# EAGLE board ATTiny Fuse Reset with 12V Charge Pump (EAGLE 7.2.0)
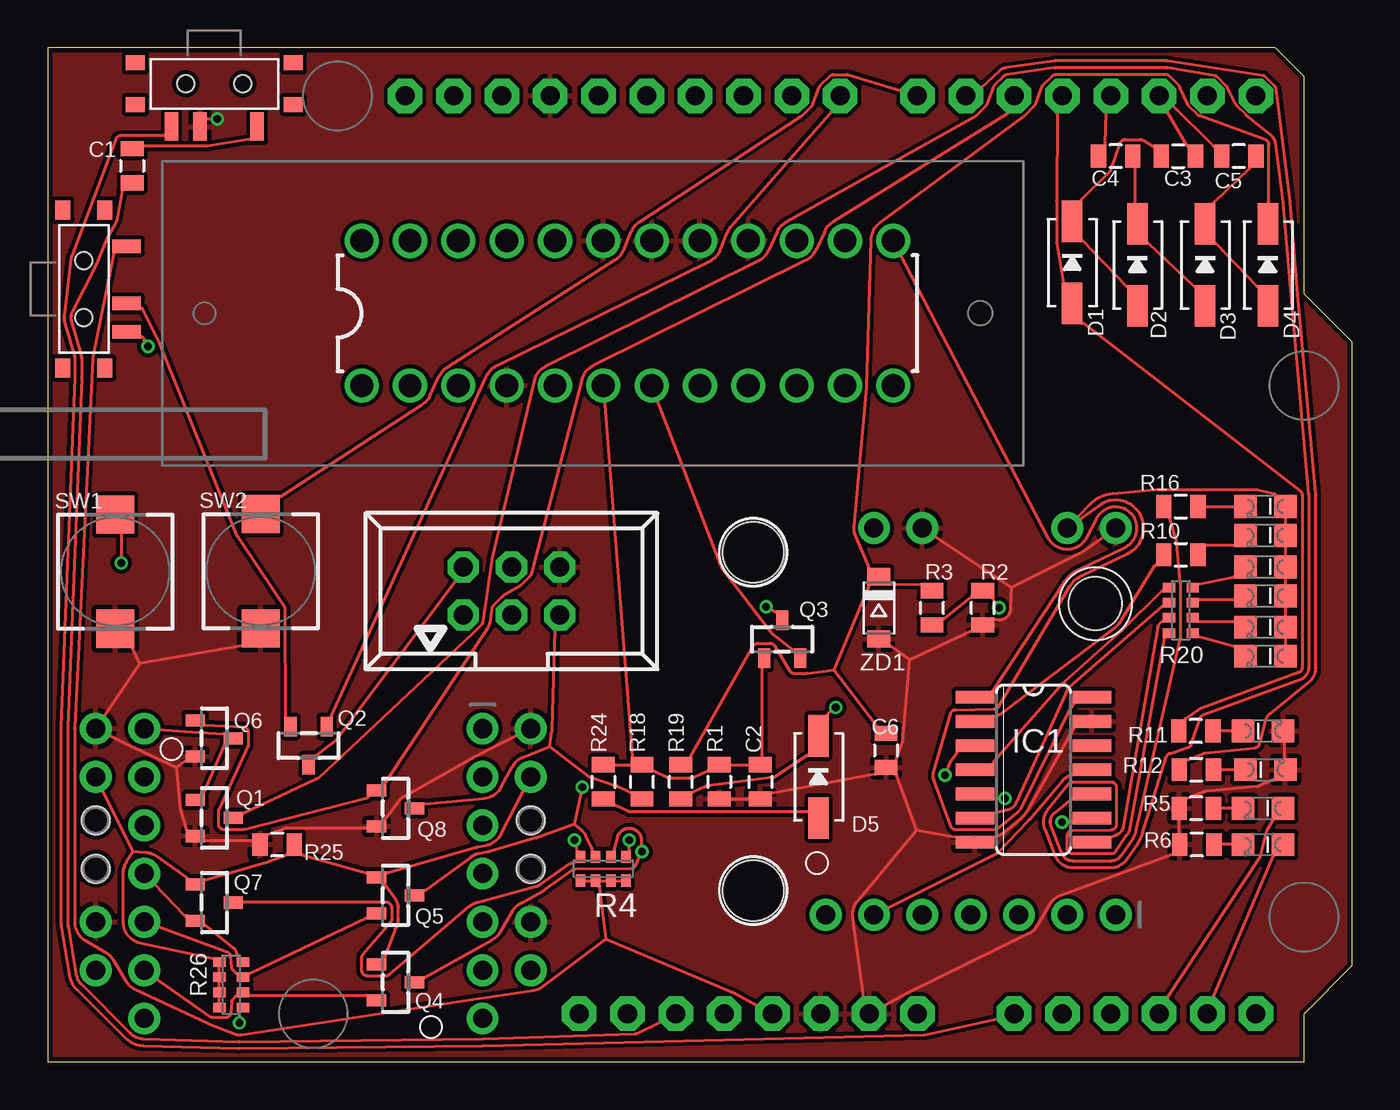
[diagram p0: board, top side]
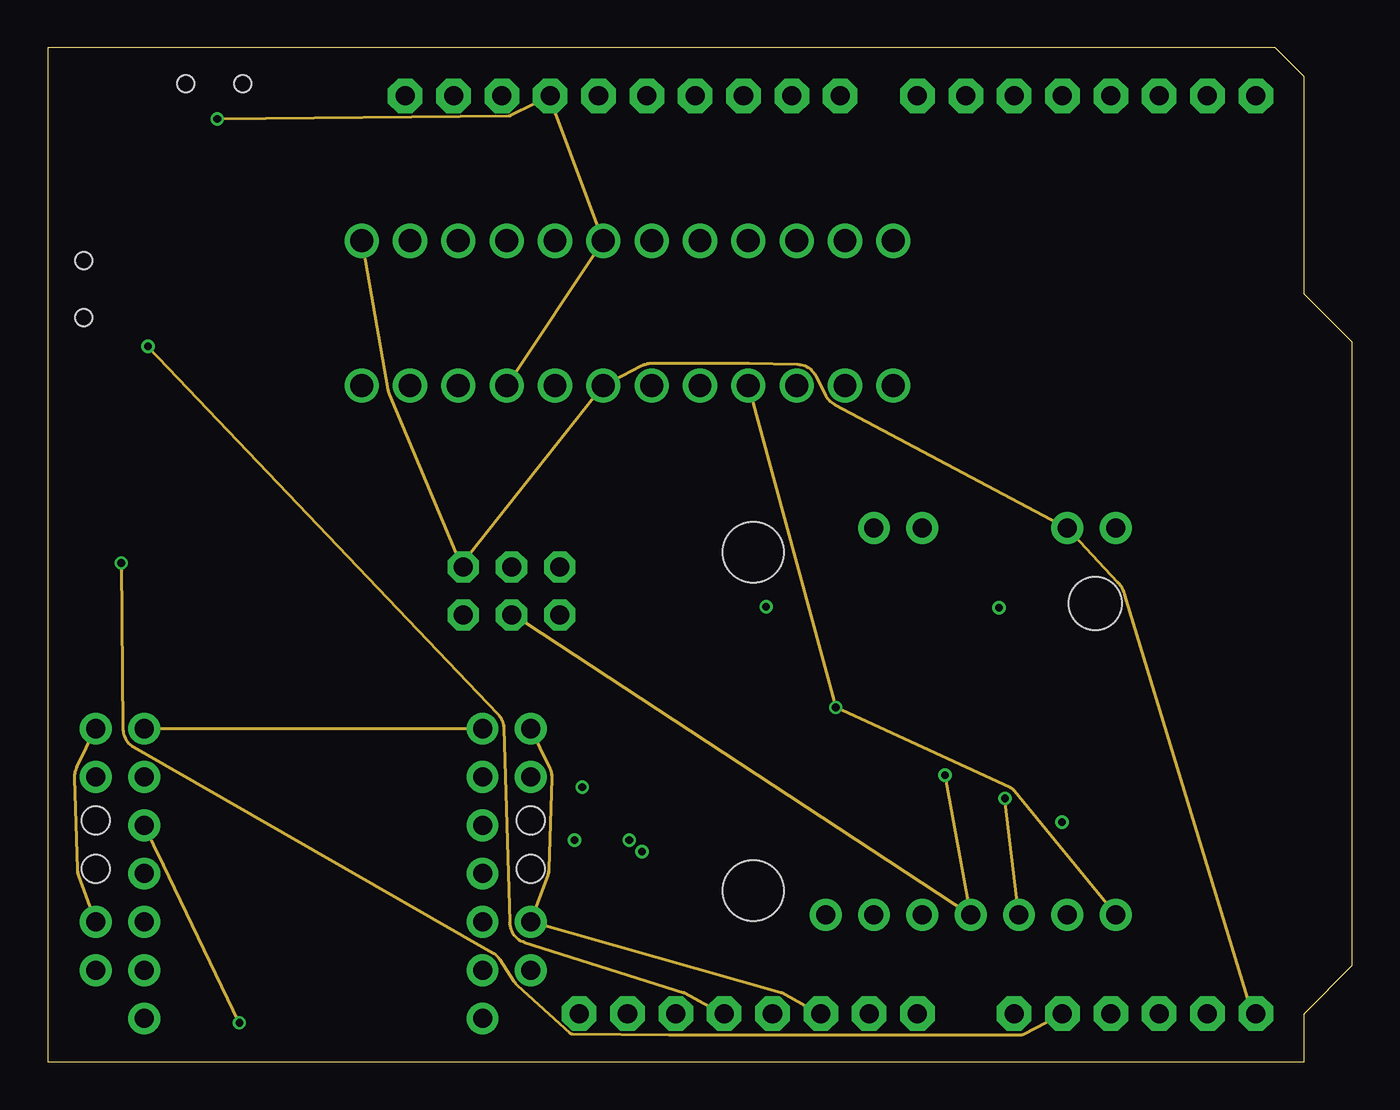
[diagram p1: board, inner layer TOP-1]
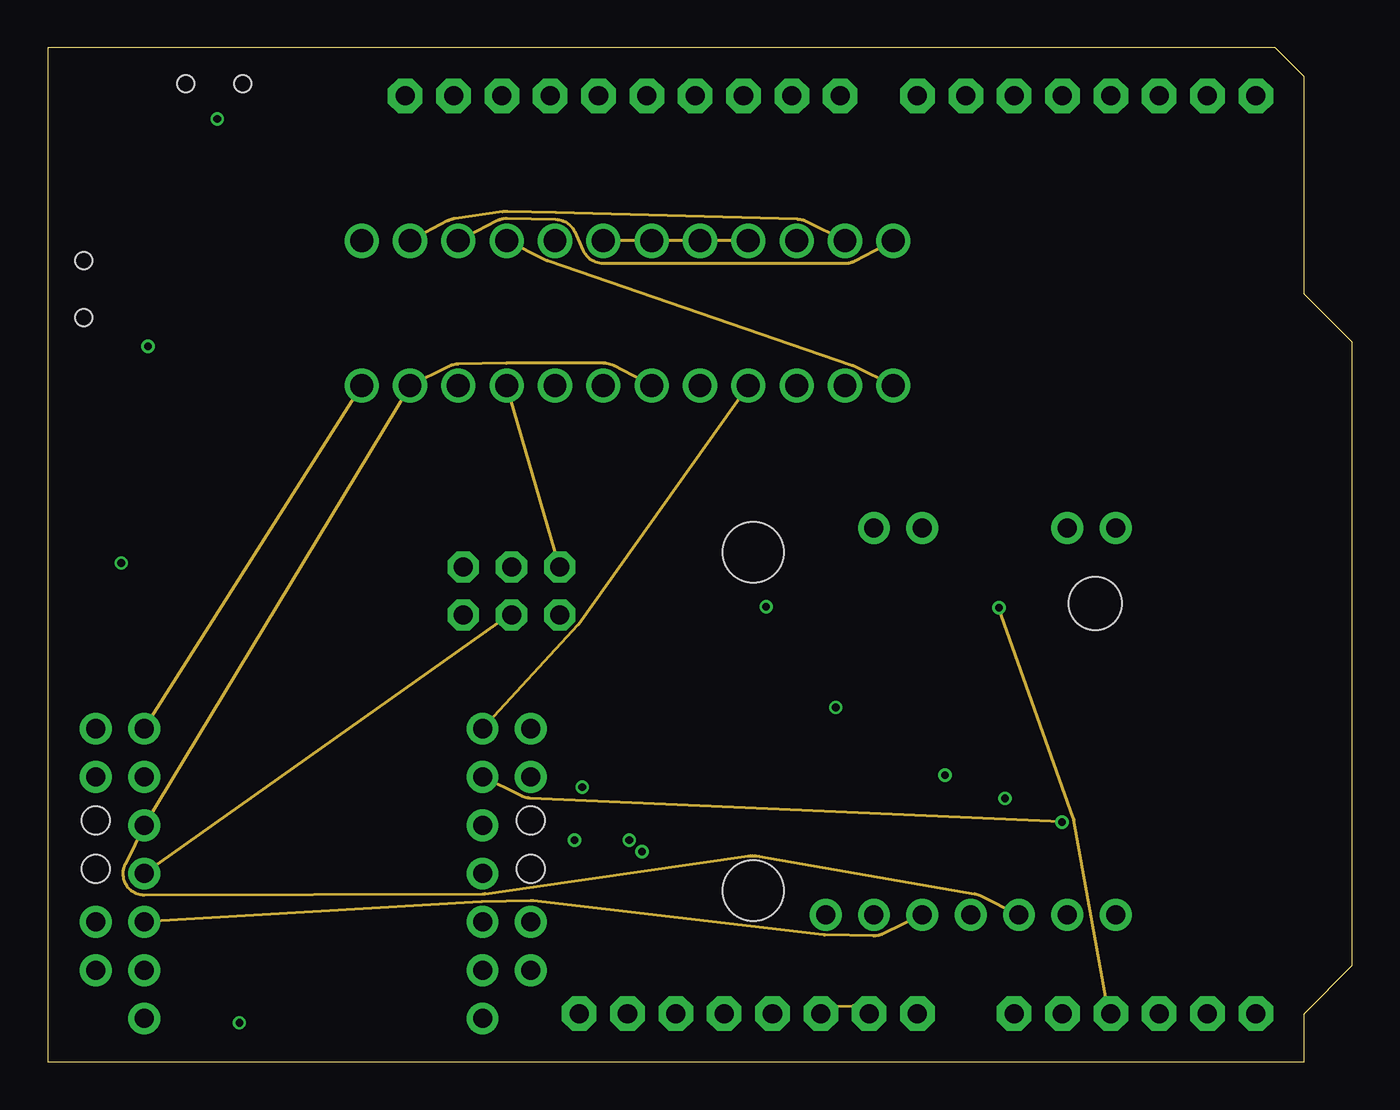
[diagram p2: board, inner layer BOTTOM+1]
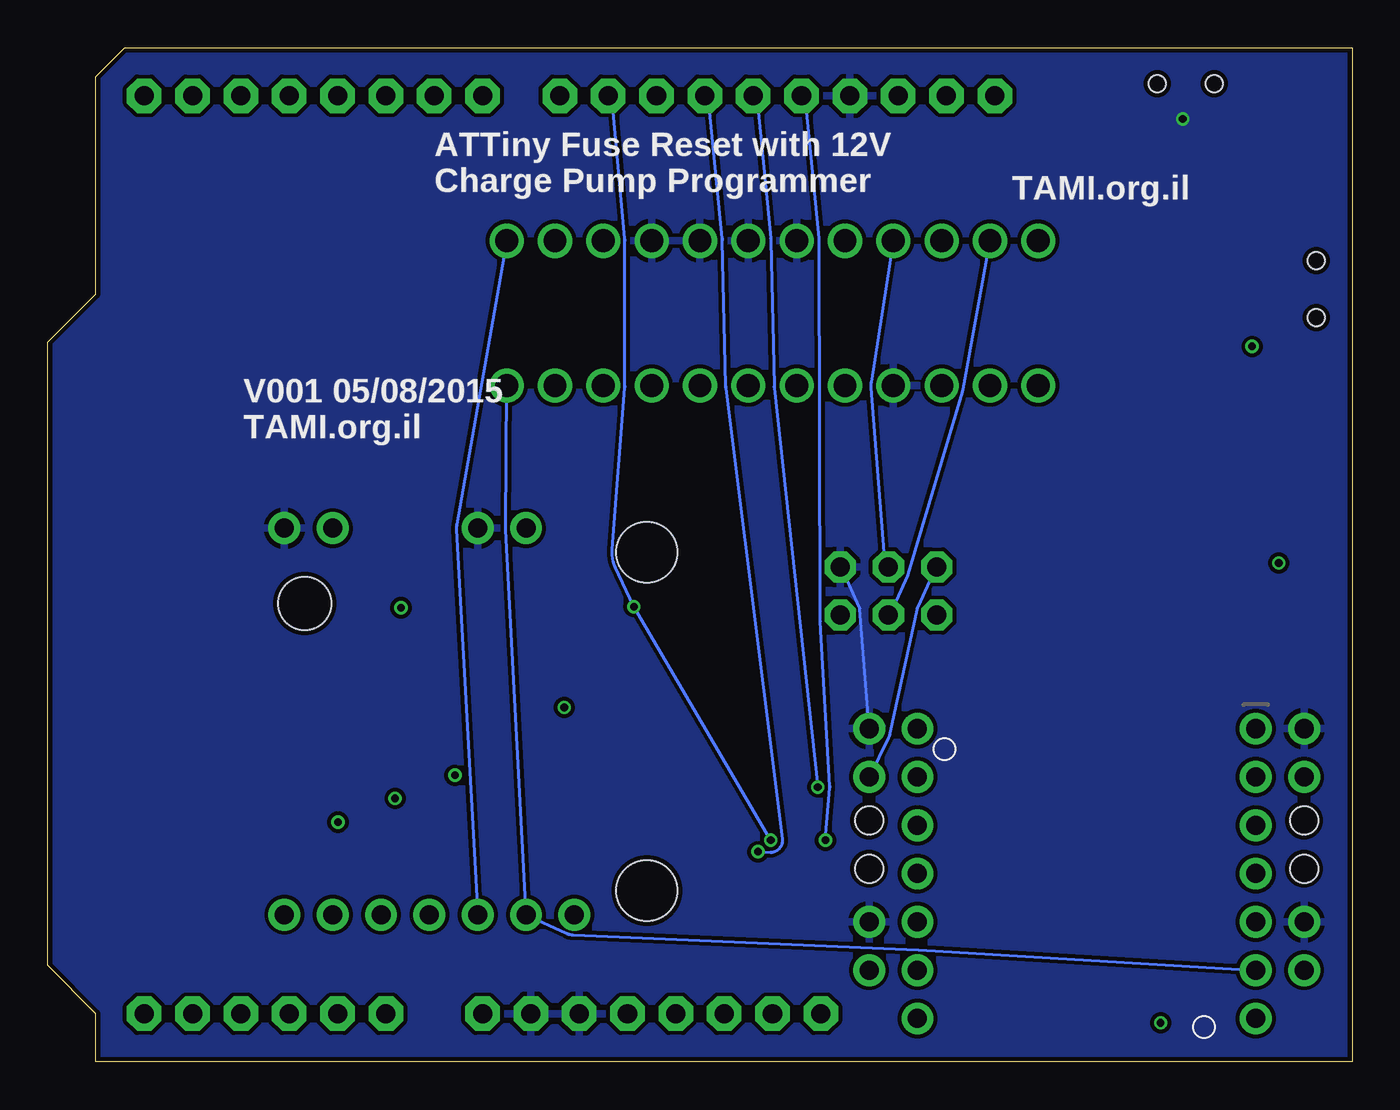
[diagram p3: board, bottom side, seen from below]

Size 68.58 x 53.34 mm. Coordinates in mm from the lower left corner, seen from the top.
Outline: 0,53.34 0,0 66.04,0 66.04,2.54 68.58,5.08 68.58,37.85 66.04,40.39 66.04,51.82 64.52,53.34 0,53.34
Copper layers 1+2+3+16: TOP 0.035mm / dielectric 0.15mm / TOP-1 0.0035mm / dielectric 0.2mm / BOTTOM+1 0.0035mm / dielectric 0.15mm / BOTTOM 0.035mm
Design rules "default": minimum track width 6mil, minimum drill 0.6mm, track to track 6mil, track to pad 8mil, pad to pad 8mil, via to via 8mil, smd to smd 8mil, copper to edge 10mil, drill to drill 8mil, minimum pad ring 0.1mm, minimum via ring 0.1mm, stop-mask expansion 4mil, vias tented up to drill 0mil, thermal gap 10mil
Net classes: 0 default: width 0.152 mm, clearance 0.205 mm

## Footprints (pad centres in the part's own frame; a part is rotated, then mirrored left to right if it is on the bottom)
BREAKOUT_TAMI_NOHOLES = drill 1 pad 1.676: 1.PB5 -10.16,-8.89; 2.PB4 -10.16,-6.35; 3.PB3 -10.16,-3.81; 4.PB2 -10.16,-1.27; 5.PB1 -10.16,1.27; 6.PB0 -10.16,3.81; 7.GND -10.16,6.35; 8.GND 10.16,-8.89; 9.VCC 10.16,-6.35; 10.GND 10.16,1.27; 11.BAT 10.16,3.81
BREAKOUT_ATTAMI = drill 1 pad 1.676: 1.PB5 1.27,1.27; 2.PB4 1.27,3.81; 3.PB3 1.27,6.35; 4.PB2 1.27,8.89; 5.PB1 1.27,11.43; 6.PB0 1.27,13.97; 7.GND 1.27,16.51; 8.GND 21.59,1.27; 9.VCC 21.59,3.81; 10.GND 21.59,11.43; 11.BAT 21.59,13.97 | hole 2.8: 17.628,2.337 | hole 3.2: 20.32,20.32; 2.54,20.32
0805 = smd 0.8 x 1.2: 1 -0.9,0; 2 0.9,0
SOD-323 = smd 2.184 x 1.067: AQ 2.159,0; CQ -2.159,0
LED-805 = smd 1.2 x 1.2: A 0,-1.05; C 0,1.05
SO14 = smd 0.66 x 2.032: 1 -3.81,-3.073; 2 -2.54,-3.073; 3 -1.27,-3.073; 4 0,-3.073; 5 1.27,-3.073; 6 2.54,-3.073; 7 3.81,-3.073; 8 3.81,3.073; 9 2.54,3.073; 10 1.27,3.073; 11 0,3.073; 12 -1.27,3.073; 13 -2.54,3.073; 14 -3.81,3.073
1X02_PP_HOLES_ONLY = drill 0.889 pad 1.397: 1 0,0; 2 2.54,0 | hole 1.473: 2.54,0; 0,0
SOT23-R = smd 0.635 x 1.016: 1 -0.95,-1; 2 0.95,-1; 3 0,1
0603-ARV = smd 0.5 x 0.65: 1 -1.2,-0.625; 2 -0.4,-0.625; 3 0.4,-0.625; 4 1.2,-0.625; 5 1.2,0.625; 6 0.4,0.625; 7 -0.4,0.625; 8 -1.2,0.625
PUSHBUTTON_SMD_SJ = smd 2 x 2: P$1 3,0; P$2 -3,0
KPS-1290 = smd 0.7 x 1.5: O -2.25,2.25; P 0.75,2.25; S 2.25,2.25 | smd 1 x 0.8: P$1 -4.15,1.1; P$2 -4.15,-1.1; P$3 4.15,-1.1; P$4 4.15,1.1 | hole 0.9: 1.5,0; -1.5,0
ARDUINOR3-BPLACE = drill 1 pad 1.815 octagon: 3V 35.56,2.54; 5V 38.1,2.54; A0 50.8,2.54; A1 53.34,2.54; A2 55.88,2.54; A3 58.42,2.54; A4 60.96,2.54; A5 63.5,2.54; AREF 23.876,50.8; D0 63.5,50.8; D1 60.96,50.8; D2 58.42,50.8; D3 55.88,50.8; D4 53.34,50.8; D5 50.8,50.8; D6 48.26,50.8; D7 45.72,50.8; D8 41.656,50.8; D9 39.116,50.8; D10 36.576,50.8; D11 34.036,50.8; D12 31.496,50.8; D13 28.956,50.8; GND 26.416,50.8; GND1 43.18,2.54; GND2 40.64,2.54; IOREF 30.48,2.54; RESERVED 27.94,2.54; RESET 33.02,2.54; SCL 18.796,50.8; SDA 21.336,50.8; VIN 45.72,2.54
DIL-24-ZIF = drill 1.2 pad 1.8: P$1 -13.97,-3.81; P$2 -11.43,-3.81; P$3 -8.89,-3.81; P$4 -6.35,-3.81; P$5 -3.81,-3.81; P$6 -1.27,-3.81; P$7 1.27,-3.81; P$8 3.81,-3.81; P$9 6.35,-3.81; P$10 8.89,-3.81; P$11 11.43,-3.81; P$12 13.97,-3.81; P$13 13.97,3.81; P$14 11.43,3.81; P$15 8.89,3.81; P$16 6.35,3.81; P$17 3.81,3.81; P$18 1.27,3.81; P$19 -1.27,3.81; P$20 -3.81,3.81; P$21 -6.35,3.81; P$22 -8.89,3.81; P$23 -11.43,3.81; P$24 -13.97,3.81
057-006-1 = drill 1 pad 1.632 octagon: 1 -2.54,-1.27; 2 -2.54,1.27; 3 0,-1.27; 4 0,1.27; 5 2.54,-1.27; 6 2.54,1.27
SOD-123 = smd 0.91 x 1.22: A 1.635,0; C -1.635,0

## Placement (x,y rotation side)
A1  [BREAKOUT_TAMI_NOHOLES]  12.7,8.64 180 top
A2  [BREAKOUT_ATTAMI]  57.4,6.48 90 top
A3  [BREAKOUT_TAMI_NOHOLES]  15.24,8.64 180 bottom
C1  [0805]  4.45,47.12 270 top
C2  [0805]  37.47,14.73 270 top
C3  [0805]  59.44,47.62 0 top
C4  [0805]  56.13,47.62 180 top
C5  [0805]  62.61,47.62 180 top
C6  [0805]  44.07,16.38 270 top
D1  [SOD-323]  53.85,42.04 270 top
D2  [SOD-323]  57.28,41.91 270 top
D3  [SOD-323]  60.83,41.91 270 top
D4  1N4148  [SOD-323]  64.14,41.91 270 top
D5  [SOD-323]  40.51,14.99 270 top
HBEAT  H.B.  [LED-805]  64.01,15.37 270 top
HVON  HV  [LED-805]  63.88,17.4 270 top
IC1  74HC04D  [SO14]  51.82,15.37 270 top
ISP  pmd  [LED-805]  63.88,13.34 90 top
ISP_ERR  err  [LED-805]  63.88,11.43 90 top
JP1  [1X02_PP_HOLES_ONLY]  25.4,10.16 90 top
JP2  [1X02_PP_HOLES_ONLY]  2.54,10.16 90 top
PB0  PB0  [LED-805]  64.01,29.21 90 top
PB1  PB1  [LED-805]  64.01,27.69 90 top
PB2  PB2  [LED-805]  64.01,26.04 90 top
PB3  PB3  [LED-805]  64.01,24.51 90 top
PB4  PB4  [LED-805]  64.01,22.86 90 top
PB5  PB5  [LED-805]  64.01,21.34 90 top
Q1  BSS138  [SOT23-R]  8.76,12.83 270 top
Q2  PMV65XP  [SOT23-R]  13.72,16.64 180 top
Q3  BSS138  [SOT23-R]  38.61,22.23 0 top
Q4  BSS138  [SOT23-R]  18.29,4.19 270 top
Q5  BSS138  [SOT23-R]  18.29,8.76 270 top
Q6  BSS138  [SOT23-R]  8.76,17.02 270 top
Q7  BSS138  [SOT23-R]  8.76,8.38 270 top
Q8  BSS130  [SOT23-R]  18.29,13.34 270 top
R1  4.7K  [0805]  35.31,14.73 270 top
R2  [0805]  49.15,23.88 90 top
R3  [0805]  46.48,23.88 90 top
R4  4k7  [0603-ARV]  29.21,10.16 180 top
R5  [0805]  60.38,13.34 180 top
R6  [0805]  60.4,11.43 180 top
R10  330R  [0805]  59.56,26.67 0 top
R11  [0805]  60.35,17.4 180 top
R12  [0805]  60.38,15.37 0 top
R16  330R  [0805]  59.56,29.21 0 top
R18  4.7K  [0805]  31.24,14.73 90 top
R19  [0805]  33.27,14.73 90 top
R20  330R  [0603-ARV]  59.56,23.75 90 top
R24  [0805]  29.21,14.73 270 top
R25  1k  [0805]  12.06,11.43 180 top
R26  4k7  [0603-ARV]  9.65,4.06 90 top
SW1  [PUSHBUTTON_SMD_SJ]  3.56,25.78 270 top
SW2  [PUSHBUTTON_SMD_SJ]  11.2,25.81 270 top
SW3  SWITCH_SPDT  [KPS-1290]  8.76,51.44 180 top
SW4  SWITCH_SPDT  [KPS-1290]  1.91,40.64 270 top
U1  [ARDUINOR3-BPLACE]  0,0 0 top
U$2  ZIFSOCKET-24  [DIL-24-ZIF]  30.48,39.37 0 top
X1  [057-006-1]  24.38,24.77 0 top
ZD1  [SOD-123]  43.69,23.88 270 top

## Library data of the parts
A1-A3 C1-C6 D1-D5 HBEAT HVON ISP ISP_ERR PB0 PB1-PB5 R1-R3 R5 R6 R10-R12 R16 R18 R19 R24 R25 U1 = ATtami
IC1 = 74xx-eu
JP1 JP2 = SparkFun-Connectors
Q1-Q8 SW1 SW2 = microbuilder
R4 R20 R26 = SparkFun-Passives
SW3 SW4 = SparkFun-Electromechanical
U$2 = ATTiny Fuse Reset with 12V Charge Pump
X1 = con-panduit
ZD1 = dp_devices

## Nets
11.5V: C6.1 D4.CQ R3.2 R19.2 ZD1.C
ATTINY_VCC: A1.9.VCC A2.9.VCC A3.9.VCC C2.1 IC1.14 PB0.A PB1.A PB2.A PB3.A PB4.A PB5.A Q2.3 Q3.1 Q4.1 Q5.1 Q7.1 R1.1 R18.2 R24.1 R25.1 R26.5 R26.6 R26.7 R26.8 U1.A5 U$2.P$6 U$2.P$24 X1.2
GND: A1.8.GND A1.10.GND A2.8.GND A2.10.GND A3.8.GND A3.10.GND C2.2 C6.2 HBEAT.C HVON.C IC1.7 IC1.13 Q1.2 Q6.2 Q8.2 R1.2 R2.1 R5.2 R6.2 R25.2 SW1.P$1 SW2.P$1 SW3.P U1.GND U1.GND1 U1.GND2 U$2.P$4 U$2.P$16 U$2.P$17 U$2.P$18 U$2.P$19 X1.6 ZD1.A
HV/RESET: A1.1.PB5 A2.1.PB5 A3.1.PB5 D5.CQ Q1.1 Q6.3 R19.1 U$2.P$1 U$2.P$9
HV_OFF(RESET): Q6.1 Q8.1 U1.D5
HV_SENSE: R2.2 R3.1 U1.A2
ISP_RESET: Q8.3 R18.1 X1.5
N$1: Q2.2 SW4.P
N$2: Q3.3 R4.1 U1.D9
N$3: SW3.S U1.A0
N$4: HVON.A R11.1
N$5: D5.AQ R24.2
N$6: ISP.C R5.1
N$7: A1.2.PB4 IC1.9
N$8: Q4.3 R4.2 U1.D11
N$9: SW1.P$2 U1.A1
N$10: C3.1 D1.CQ D2.AQ
N$11: C4.1 D2.CQ D3.AQ
N$12: C5.1 D3.CQ D4.AQ
N$13: IC1.10 R16.1
N$14: C1.1 SW3.O
N$15: ISP_ERR.C R6.1
N$16: SW4.S U1.3V
N$17: ISP_ERR.A U1.A4
N$18: ISP.A U1.A3
N$19: R12.1 U1.D6
N$20: HBEAT.A R12.2
N$21: IC1.2 R10.1
N$22: SW2.P$2 U1.D7
N$23: PB2.C R20.4
N$24: IC1.4 R20.5
N$25: PB1.C R10.2
N$26: IC1.6 R20.6
N$27: PB0.C R16.2
N$28: IC1.8 R20.7
N$29: PB3.C R20.3
N$30: PB4.C R20.2
N$31: PB5.C R20.1
N$32: Q1.3 R20.8
N$33: C1.2 U1.RESET
N$34: Q7.3 R4.4 U1.D13
N$36: X1.1
N$37: Q5.3 R4.3 U1.D12
P1: C3.2 C5.2 U1.D2
P2: C4.2 U1.D3
PUMP_VCC: D1.AQ R11.2 U1.D4
SCI: A2.3.PB3 A3.3.PB3 IC1.5 Q3.2 R26.1 U$2.P$2 U$2.P$7
SDI_MOSI: A2.6.PB0 A3.6.PB0 IC1.11 Q4.2 R26.2 U$2.P$12 U$2.P$21 X1.4
SDO-SCK: A2.4.PB2 A3.4.PB2 IC1.3 Q7.2 R26.4 U$2.P$14 U$2.P$23 X1.3
SII-MISO: A2.5.PB1 A3.5.PB1 IC1.1 Q5.2 R26.3 U$2.P$13 U$2.P$22
VCC: R4.5 R4.6 R4.7 R4.8 SW4.O U1.5V
VCC_OFF: Q2.1 U1.D8
VIN: U1.VIN

## Tracks (layer width: path | path; a pad name or v marks a point on that pad's centre or on a via)
11.5V
  TOP 0.152: ZD1.C 44.22,25.13 44.3,25.13 45.88,25.1 45.96,25.1 R3.2 | ZD1.C 43.15,25.13 43.15,25.06 arc-23 43.15,25.03 41.32,20.62 | D4.CQ 64.19,45.09 64.19,45.16 64.19,48.23 arc70 64.01,48.49 60.53,49.75 arc-25 60.45,49.8 59.96,50.29 arc-21 59.91,50.36 59.52,51.26 arc21 59.46,51.35 58.97,51.84 arc45 58.77,51.92 52.99,51.92 arc45 52.79,51.84 52.3,51.35 arc24 52.24,51.25 51.9,50.35 arc-24 51.84,50.25 51.35,49.76 arc-8 51.31,49.73 43.75,44.13 arc52 43.27,43.22 43.04,35.53 arc-3 43.03,35.46 42.37,28.16 arc28 42.45,27.65 43.15,26 arc-23 43.15,25.97 43.15,25.89 ZD1.C | C6.1 43.55,17.61 43.55,17.68 arc37 43.53,17.73 41.32,20.62 | R19.2 33.8,15.96 33.8,16.03 arc-30 33.81,16.07 37.09,21.87 arc-60 37.34,22.02 37.98,22.02 arc-59 38.22,21.88 39,20.57 arc59 39.24,20.43 39.88,20.43 arc7 39.91,20.44 41.32,20.62
ATTINY_VCC
  TOP 0.152: PB5.A 65.06,21.86 65.06,21.94 65.06,22.26 65.06,22.34 PB4.A 65.06,23.38 65.06,23.46 65.06,23.91 65.06,23.99 PB3.A 65.06,25.04 65.06,25.11 65.06,25.43 65.06,25.51 PB2.A 65.06,26.56 65.06,26.64 65.06,27.09 65.06,27.16 PB1.A 65.06,28.21 65.06,28.29 65.06,28.61 65.06,28.69 PB0.A 64.53,29.73 64.53,29.81 arc77 64.47,29.88 63.62,30.08 arc13 63.56,30.09 58.26,30.09 arc5 58.24,30.09 55.98,29.9 arc41 54.81,29.34 A2.9.VCC 55.27,29.27 arc-190 56.77,26.74 54.36,25.57 arc34 53.66,24.93 50,18.7 arc-58 49.77,18.57 47.72,18.52 arc72 47.46,18.32 46.57,15.25 arc36 46.58,14.86 47.46,12.4 arc70 47.73,12.21 49.76,12.21 arc39 49.94,12.28 50.94,13.1 arc25 51.2,13.43 53.62,18.36 arc-10 53.65,18.4 53.94,18.8 arc36 53.95,18.85 53.95,18.92 IC1.14 | Q5.1 16.86,9.95 16.78,9.95 arc-16 16.76,9.96 13.39,10.9 arc16 13.37,10.91 13.29,10.91 R25.1 12.64,10.91 12.56,10.91 arc21 12.54,10.9 11.67,10.57 arc-5 11.64,10.56 8.29,9.58 arc-16 8.27,9.57 8.2,9.57 Q7.1 7.33,9.57 7.33,9.65 arc55 7.3,9.71 5.72,10.82 arc32 5.15,11.02 4.5,11.06 | X1.2 21.53,25.39 21.48,25.34 arc8 21.47,25.33 15.21,16.96 arc-16 15.15,16.91 14.08,16.08 arc-37 14.03,16.07 13.96,16.07 Q2.3 | 4.5,11.06 A1.9.VCC | R26.8 9.03,3.04 9.03,3.11 9.03,3.41 9.03,3.49 R26.7 9.03,3.84 9.03,3.91 9.03,4.21 9.03,4.29 R26.6 9.03,4.64 9.03,4.71 9.03,5.01 9.03,5.09 R26.5 8.78,5.44 8.7,5.44 arc-12 8.69,5.44 4.84,6.27 arc-78 3.96,7.37 3.96,9.91 arc-33 4.15,10.52 4.5,11.06 | U$2.P$6 30.72,16.04 30.72,16.03 30.72,15.96 R18.2 | R24.1 29.73,15.63 29.81,15.63 30.64,15.63 30.72,15.63 R18.2 | R18.2 31.77,15.31 31.84,15.31 arc-25 31.88,15.3 32.55,14.98 arc25 32.67,14.95 33.87,14.95 arc25 33.99,14.98 34.67,15.3 arc-25 34.71,15.31 34.78,15.31 R1.1 35.83,15.63 35.91,15.63 36.87,15.63 36.94,15.63 C2.1 37.56,15.96 37.56,16.03 37.56,20.72 37.56,20.79 Q3.1
  TOP 0.152: Q4.1 17.72,5.38 17.72,5.46 arc-21 17.73,5.49 18.39,7.27 arc21 18.44,7.5 18.44,8.13 arc34 18.32,8.49 17.73,9.35 arc-34 17.72,9.4 17.72,9.47 Q5.1 | Q5.1 17.72,9.95 17.8,9.95 arc16 17.82,9.96 22.47,11.28 arc-5 22.59,11.3 23.07,11.4 arc51 23.8,11.95 A3.9.VCC
  TOP-1 0.152: U$2.P$24 17.89,35.35 arc13 17.96,35.1 21.46,26.76 arc22 21.48,26.73 21.53,26.68 X1.2 22.16,26.68 22.21,26.73 22.22,26.74 U$2.P$6 31.2,36.61 arc-28 31.75,36.74 36.83,36.74 arc-1 36.85,36.74 39.39,36.69 arc-62 40.37,36.08 40.91,35.04 arc35 41.38,34.56 A2.9.VCC 56.26,25.22 arc-26 56.63,24.58 63.08,3.36 arc27 63.1,3.33 63.1,3.32 63.15,3.27 U1.A5
  BOTTOM 0.152: X1.2 22.16,25.39 22.21,25.34 22.21,25.33 arc-19 22.23,25.31 22.86,23.92 arc-12 22.87,23.87 24.31,17.29 arc14 24.39,17.03 A3.9.VCC
GND  (via drill 0.4 pad 0.7)
  TOP 0.152: 6.79,15.5 4.61,16.51 arc-1 4.59,16.52 A1.8.GND 4.84,20.95 | R1.2 35.83,13.83 35.91,13.83 36.87,13.83 36.94,13.83 C2.2 37.99,14.16 38.06,14.16 arc11 38.08,14.16 43.45,15.16 arc-11 43.47,15.16 43.55,15.16 C6.2 | 6.79,15.5 6.97,13.43 arc11 6.99,13.38 7.33,12.22 arc-16 7.33,12.19 7.33,12.12 Q1.2 8.2,11.65 8.27,11.65 10.77,11.65 10.84,11.65 R25.2 11.49,11.95 11.56,11.95 arc21 11.59,11.96 12.46,12.29 arc-21 12.56,12.31 16.78,12.31 16.86,12.31 Q8.2 17.72,12.63 17.72,12.7 arc-37 17.73,12.75 18.56,13.82 arc-23 18.64,13.9 22.31,15.96 arc-3 22.36,15.98 A3.8.GND | 45.66,12.17 47.71,11.81 arc10 47.73,11.81 47.8,11.81 IC1.7 49.68,11.81 49.76,11.81 arc22 49.79,11.82 50,11.91 arc17 50.16,12 51.16,12.82 arc21 51.49,13.2 53.67,17.08 53.94,17.54 arc30 53.95,17.58 53.95,17.65 IC1.13 | 45.66,12.17 42.57,8.46 arc48 42.33,7.59 42.91,3.39 arc-8 42.91,3.38 42.91,3.3 U1.GND1 43.91,2.89 43.96,2.94 43.97,2.94 arc-15 43.98,2.95 45.24,3.63 45.25,3.63 51.55,6.74 arc33 52.02,7.18 52.67,8.29 arc-39 53.23,8.75 59.08,10.9 arc-20 59.1,10.91 59.18,10.91 R6.2 59.49,11.95 59.49,12.03 59.49,12.73 59.49,12.81 R5.2 59.8,13.86 59.88,13.86 arc21 59.9,13.86 60.77,14.2 arc-15 60.85,14.21 63.59,14.49 arc18 63.67,14.51 64.43,14.84 arc-23 64.46,14.84 64.53,14.84 HBEAT.C 65,15.89 65,15.97 65,16.8 65,16.88 HVON.C | v8.92,49.59 8.36,49.59 8.29,49.59 SW3.P | 45.32,21.15 48.52,22.64 arc-25 48.55,22.65 48.62,22.65 R2.1 49.67,23.3 49.75,23.3 49.81,23.28 arc105 50.63,23.86 50.68,24.96 | C6.2 44.59,15.16 44.59,15.08 arc20 44.6,15.06 45.66,12.17 | A2.8.GND 54.45,26.86 arc-9 54.26,26.75 50.68,24.96
  TOP 0.152: 4.84,20.95 4.49,21.75 arc-24 4.48,21.78 4.48,21.86 SW1.P$1 | 6.79,15.5 7.21,15.81 arc-37 7.25,15.83 7.33,15.83 Q6.2 | 50.68,24.96 A2.10.GND | ZD1.A 44.22,21.86 44.3,21.86 arc-36 44.34,21.85 45.32,21.15 | C6.2 44.59,15.81 44.59,15.88 arc-21 44.6,15.91 44.93,16.78 arc16 44.95,16.86 45.32,21.15 | SW2.P$1 10.28,21.88 10.2,21.88 arc10 10.19,21.88 4.84,20.95
  TOP-1 0.152: U1.GND2 39.91,2.89 39.86,2.94 38.58,3.63 arc12 38.52,3.65 A3.10.GND 26.31,9.83 arc18 26.36,10.13 26.52,14.95 arc28 26.41,15.48 A3.8.GND | v8.92,49.59 24.23,49.73 arc25 24.32,49.76 25.61,50.38 arc18 25.63,50.4 25.69,50.45 U1.GND 26.69,50.04 26.69,49.96 arc20 26.69,49.94 U$2.P$19 U$2.P$4 | A1.10.GND 1.63,9.83 arc-18 1.57,10.13 1.42,14.95 arc-28 1.53,15.48 A1.8.GND
  BOTTOM+1 0.152: X1.6 26.69,26.71 26.69,26.79 arc16 26.68,26.81 U$2.P$4 | U$2.P$16 U$2.P$17 U$2.P$18 U$2.P$19 | U1.GND2 41.37,2.89 41.42,2.94 42.34,2.96 arc-45 42.39,2.94 42.4,2.94 42.45,2.89 U1.GND1
  BOTTOM 0.152: A3.8.GND 25.89,23.83 arc-20 25.91,23.92 26.56,25.34 26.61,25.39 X1.6
  pour TOP: -3.05,54.74 -3.05,-1.14 3.43,-7.62 64.39,-7.62 75.44,3.43 75.44,51.56 70.99,56.01 -1.27,56.01 -2.29,57.02
  pour BOTTOM: -1.27,54.61 -1.27,-1.27 69.85,-1.27 69.85,53.34 0,54.61
HV/RESET  (via drill 0.4 pad 0.7)
  TOP 0.152: Q1.1 8.2,14.02 8.2,14.1 arc-24 8.2,14.12 9.32,16.67 arc24 9.33,16.7 9.33,16.78 Q6.3 9.33,17.26 9.26,17.26 9.25,17.26 7.24,17.37 A3.1.PB5 | v41.42,18.64 41,18.3 arc51 40.97,18.24 40.97,18.16 D5.CQ 40.06,16.13 39.98,16.13 arc33 39.94,16.12 38.22,15 arc-26 38.1,14.95 34.67,14.51 arc18 34.59,14.49 33.91,14.16 arc-25 33.87,14.16 33.8,14.16 R19.1
  TOP-1 0.152: A2.1.PB5 50.8,14.26 arc26 50.58,14.44 v41.42,18.64 U$2.P$9 | A3.1.PB5 A1.1.PB5
  BOTTOM+1 0.152: A3.1.PB5 U$2.P$1 | A1.1.PB5 27.89,22.99 arc7 27.91,23.02 U$2.P$9
HV_OFF(RESET)
  TOP 0.152: U1.D5 50.53,50.04 50.53,49.96 arc-46 50.51,49.91 50.5,49.91 arc-12 50.48,49.89 41.29,44.18 arc34 40.84,43.67 40.4,42.71 arc-39 39.87,42.17 28.68,36.62 arc49 28.07,35.86 25.41,25.65 arc-30 25.34,25.52 24.89,25.08 arc-14 24.84,25.04 23.93,24.49 arc14 23.87,24.45 23.43,24.01 arc36 23.35,23.85 23.23,23.08 arc-24 23.13,22.83 17.73,14.64 arc33 17.72,14.6 17.72,14.53 Q8.1 16.86,14.04 16.86,13.97 arc-76 16.8,13.89 10.34,12.24 arc-14 10.27,12.23 9.26,12.23 arc-90 8.97,12.51 8.97,13.14 arc-25 9,13.26 10.53,16.58 arc25 10.55,16.7 10.55,17.34 arc87 10.29,17.62 8.28,17.73 8.27,17.73 8.2,17.73 Q6.1
HV_SENSE  (via drill 0.4 pad 0.7)
  TOP 0.152: R3.1 47.01,23.3 47.08,23.3 arc39 47.13,23.32 48.5,24.43 arc-39 48.55,24.45 48.62,24.45 R2.2 49.67,24.45 49.67,24.38 arc35 49.69,24.33 v50,23.88
  BOTTOM+1 0.152: U1.A2 55.61,3.3 55.61,3.38 arc10 55.61,3.39 53.94,12.72 arc9 53.91,12.82 v50,23.88
ISP_RESET
  TOP 0.152: R18.1 30.72,14.16 30.64,14.16 arc-25 30.61,14.16 29.93,14.49 arc7 29.9,14.5 28.52,14.96 arc-19 28.44,15.01 26.4,16.6 | 26.4,16.6 26.51,17.37 arc6 26.52,17.49 26.69,22.74 26.69,22.82 X1.5 | Q8.3 19.72,13.58 19.8,13.58 22.96,13.87 arc57 23.85,14.46 24.41,15.51 arc-40 24.98,16.02 26.4,16.6
N$1
  TOP 0.152: Q2.2 12.53,18.07 12.53,18.14 12.53,18.15 12.48,23.81 arc33 12.44,23.96 9.97,27.65 arc-12 9.94,27.7 5.86,37.86 arc5 5.84,37.91 5,39.59 arc64 4.91,39.65 4.83,39.65 SW4.P
N$2  (via drill 0.4 pad 0.7)
  TOP 0.152: R4.1 30.57,11.03 30.57,11.11 v30.57,11.66 | v37.77,23.95 38.25,23.67 arc30 38.29,23.66 38.37,23.66 Q3.3
  BOTTOM 0.152: v30.57,11.66 v37.77,23.95 38.74,26.02 arc30 38.91,26.94 38.24,35.47 arc-4 38.24,35.56 38.24,43.18 arc-5 38.24,43.28 38.84,49.95 38.84,49.96 38.84,50.04 U1.D9
N$3
  TOP 0.152: SW3.S 6.24,48.7 6.16,48.7 3.85,48.7 arc69 3.58,48.52 2.39,45.37 1.27,42.38 arc14 1.23,42.22 0.88,39.26 arc23 0.91,38.85 1.43,37.05 arc-16 1.43,36.99 1.43,35.99 1.43,35.98 0.71,17.6 arc2 0.7,17.53 0.7,7.37 arc9 0.73,7.07 1.13,4.6 arc36 1.53,3.82 4.07,1.28 arc43 5.04,0.86 10.04,0.71 arc2 10.09,0.71 22.88,0.86 arc1 22.89,0.86 46.07,1.42 arc11 46.13,1.43 49.95,2.27 arc-12 49.96,2.27 50.04,2.27 U1.A0
N$4
  TOP 0.152: HVON.A 62.31,17.4 62.23,17.4 61.65,17.4 61.57,17.4 R11.1
N$5
  TOP 0.152: D5.AQ 40.06,13.15 39.98,13.15 30.64,13.15 arc-25 30.52,13.18 29.84,13.5 arc25 29.81,13.51 29.73,13.51 R24.2
N$6
  TOP 0.152: ISP.C 62.31,13.34 62.23,13.34 61.68,13.34 61.6,13.34 R5.1
N$7  (via drill 0.4 pad 0.7)
  TOP 0.152: IC1.9 53.95,12.61 53.87,12.61 v53.32,12.61
  BOTTOM+1 0.152: v53.32,12.61 25.35,13.87 arc-24 24.91,13.98 A1.2.PB4
N$8  (via drill 0.4 pad 0.7)
  TOP 0.152: R4.2 29.78,11.03 29.78,11.11 arc-14 29.79,11.13 29.96,11.82 arc-163 31.2,11.7 v31.24,11.05 30.92,10.34 arc-65 30.66,10.18 27.76,10.14 arc34 27.6,10.09 26.16,9.08 arc-6 26.04,9 24.86,8.35 arc30 24.44,7.93 23.78,6.82 arc-30 23.38,6.43 19.83,4.44 arc-29 19.8,4.43 19.72,4.43 Q4.3
  BOTTOM 0.152: v31.24,11.05 30.59,11.03 arc-99 29.95,11.74 32.92,35.41 arc6 32.93,35.53 33.11,43.21 arc-4 33.11,43.3 33.77,49.95 33.77,49.96 33.77,50.04 U1.D11
N$9  (via drill 0.4 pad 0.7)
  TOP 0.152: SW1.P$2 3.87,27.86 3.87,27.78 v3.87,26.24
  TOP-1 0.152: v3.87,26.24 3.96,17.52 arc60 4.52,16.55 23.39,5.75 arc-27 23.76,5.4 24.5,4.25 arc15 24.68,4.04 27.44,1.53 arc42 27.59,1.47 32.67,1.42 51.15,1.42 arc28 51.28,1.45 52.54,2.13 arc15 52.55,2.14 52.56,2.14 52.61,2.19 U1.A1
N$10
  TOP 0.152: C3.1 58.21,48.15 58.14,48.15 arc-31 58.1,48.16 57.58,48.47 arc31 57.43,48.51 56.63,48.51 arc71 56.37,48.31 55.9,46.94 arc-27 55.83,46.82 54.33,45.34 arc45 54.3,45.29 54.3,45.21 D1.CQ 54.3,43.18 54.38,43.18 arc-46 54.44,43.16 56.69,40.79 arc46 56.74,40.77 56.82,40.77 D2.AQ
N$11
  TOP 0.152: D3.AQ 60.38,40.77 60.3,40.77 arc-43 60.25,40.79 57.86,43.03 arc43 57.81,43.05 57.73,43.05 D2.CQ 57.16,45.09 57.16,45.16 57.16,47.02 57.16,47.1 C4.1
N$12
  TOP 0.152: D4.AQ 63.68,40.77 63.6,40.77 arc-46 63.55,40.79 61.42,43.03 arc46 61.37,43.05 61.29,43.05 D3.CQ 61.29,45.09 61.29,45.16 arc-47 61.31,45.22 63.16,46.97 arc47 63.19,47.02 63.19,47.1 C5.1
N$13
  TOP 0.152: IC1.10 53.95,13.84 53.87,13.84 arc39 53.83,13.83 52.92,13.11 arc73 52.73,12.38 53.28,10.99 arc68 53.87,10.59 55.91,10.59 arc56 56.43,10.87 57.02,11.73 arc21 57.23,12.19 59.54,22.24 arc13 59.55,22.3 59.55,25.2 arc6 59.54,25.23 59.34,27.3 arc10 59.33,27.34 58.99,28.59 arc-16 58.99,28.61 58.99,28.69 R16.1
N$14
  TOP 0.152: SW3.O 10.74,48.51 10.66,48.51 arc9 10.65,48.51 8.41,48.16 arc-9 8.36,48.15 5.04,48.15 4.97,48.15 C1.1
N$15
  TOP 0.152: ISP_ERR.C 62.31,11.43 62.23,11.43 61.7,11.43 61.62,11.43 R6.1
N$16  (via drill 0.4 pad 0.7)
  TOP 0.152: SW4.S 4.83,38.15 4.91,38.15 arc-60 5,38.09 v5.27,37.62
  TOP-1 0.152: v5.27,37.62 23.67,18.3 arc-42 23.98,17.56 24.28,7.33 arc71 25.06,6.3 33.45,3.65 arc-11 33.5,3.63 34.78,2.94 34.83,2.89 U1.3V
N$17
  TOP 0.152: ISP_ERR.A 64.41,10.91 64.41,10.83 arc-23 64.4,10.8 61.24,3.41 arc23 61.23,3.38 61.23,3.3 U1.A4
N$18
  TOP 0.152: ISP.A 64.41,12.81 64.41,12.73 arc-30 64.4,12.7 64.09,12.17 arc16 64.06,12.1 63.7,10.76 arc-19 63.67,10.68 58.83,3.34 arc-10 58.82,3.33 58.82,3.32 58.77,3.27 U1.A3
N$19
  TOP 0.152: R12.1 59.8,15.89 59.88,15.89 arc21 59.9,15.9 60.77,16.23 arc-15 60.85,16.25 63.46,16.52 arc69 63.7,16.73 64.06,18.07 arc-36 64.15,18.22 66.29,19.96 arc51 66.66,20.74 66.66,29.81 arc5 66.65,29.9 65.71,40.36 65.31,45.21 arc2 65.3,45.24 64.57,51.17 arc38 64.5,51.31 64.01,51.8 arc36 63.88,51.87 58.92,52.62 arc9 58.77,52.64 52.99,52.64 arc8 52.85,52.63 50.36,52.27 arc35 50.02,52.11 49.05,51.2 | 49.05,51.2 | 49.05,51.2 49.04,51.2 48.99,51.15 U1.D6
N$20
  TOP 0.152: HBEAT.A 62.43,15.37 62.36,15.37 61.68,15.37 61.6,15.37 R12.2
N$21
  TOP 0.152: IC1.2 49.68,18.16 49.76,18.16 arc22 49.79,18.17 50,18.26 arc15 50.15,18.34 56.05,22.8 arc22 56.46,23.26 58.2,26.11 arc-59 58.26,26.15 58.34,26.15 R10.1
N$22
  TOP 0.152: SW2.P$2 12.12,29.73 12.2,29.73 arc33 12.24,29.74 19.69,34.57 arc33 20.12,35.07 20.56,36.03 arc-33 20.98,36.51 29.85,42.19 arc36 30.31,42.75 30.65,43.61 arc-35 31.1,44.17 39.62,49.73 arc12 39.66,49.76 40.15,50.25 arc24 40.22,50.35 40.55,51.25 arc-24 40.62,51.35 41.11,51.84 arc-45 41.31,51.92 42,51.92 arc-17 42.08,51.91 44.86,51.07 arc17 44.88,51.07 44.96,51.07 U1.D7
N$23
  TOP 0.152: R20.4 60.44,25.12 60.51,25.12 arc12 60.53,25.12 62.34,25.51 arc-12 62.36,25.51 62.43,25.51 PB2.C
N$24
  TOP 0.152: R20.5 58.69,24.77 58.61,24.77 arc45 58.56,24.75 56.46,22.69 arc-3 56.39,22.62 53.45,19.98 arc7 53.39,19.93 49.7,15.75 arc41 49.68,15.7 49.68,15.62 IC1.4
N$25
  TOP 0.152: R10.2 60.79,27.18 60.86,27.18 62.36,27.18 62.43,27.18 PB1.C
N$26
  TOP 0.152: R20.6 58.69,23.98 58.61,23.98 arc41 58.56,23.96 53.69,19.72 arc25 53.62,19.62 50.89,13.6 arc-52 50.46,13.25 49.78,13.08 arc-14 49.76,13.08 49.68,13.08 IC1.6
N$27
  TOP 0.152: R16.2 60.79,29.21 60.86,29.21 62.36,29.21 62.43,29.21 PB0.C
N$28
  TOP 0.152: R20.7 58.69,23.18 58.61,23.18 arc47 58.56,23.15 58.41,22.99 arc33 58.34,22.85 56.54,12.39 arc-58 56.15,11.91 55.93,11.82 arc-22 55.91,11.81 55.83,11.81 IC1.8
N$29
  TOP 0.152: R20.3 60.44,24.32 60.51,24.32 62.36,24.32 62.43,24.32 PB3.C
N$30
  TOP 0.152: R20.2 60.44,23.18 60.51,23.18 62.36,23.18 62.43,23.18 PB4.C
N$31
  TOP 0.152: R20.1 60.44,22.38 60.51,22.38 arc-16 60.53,22.37 62.34,21.86 arc16 62.36,21.86 62.43,21.86 PB5.C
N$32
  TOP 0.152: R20.8 58.69,22.38 58.69,22.3 arc-10 58.69,22.29 56.89,12.32 arc-24 56.73,11.94 56.14,11.07 arc-56 55.91,10.95 53.87,10.95 arc-90 53.59,11.23 53.59,11.89 arc-89 53.87,12.17 55.91,12.21 arc89 56.19,12.5 56.19,14.43 arc90 55.91,14.71 53.87,14.71 arc51 53.65,14.6 52.55,13.23 arc60 52.4,12.25 52.95,10.86 arc68 53.87,10.23 55.91,10.23 arc56 56.73,10.66 57.32,11.53 arc17 57.54,11.99 58.81,16.05 arc-55 58.99,16.24 59.93,16.53 arc54 60.12,16.71 60.58,18.09 arc-51 60.75,18.26 65.88,20.14 arc70 66.3,20.74 66.3,29.81 arc5 66.3,29.87 65.35,40.32 65.35,40.33 64.95,45.19 arc3 64.95,45.2 64.55,48.31 arc43 64.31,48.72 63.01,49.78 arc-6 62.99,49.8 62.5,50.29 arc-18 62.46,50.35 62,51.25 arc18 61.96,51.31 61.47,51.8 arc36 61.34,51.86 58.87,52.27 arc9 58.77,52.28 52.99,52.28 arc8 52.9,52.27 50.41,51.92 arc37 50.25,51.84 49.76,51.35 arc24 49.7,51.25 49.36,50.35 arc-24 49.3,50.25 48.81,49.76 arc-16 48.74,49.72 38.82,44.17 arc36 38.34,43.65 37.91,42.69 arc-39 37.35,42.12 26.17,36.57 arc50 25.57,35.82 23.36,26.41 arc5 23.35,26.39 22.88,23.14 arc-37 22.8,22.98 22.36,22.54 22.35,22.54 14.23,14.92 arc-18 14.15,14.87 10.3,13.07 arc-25 10.27,13.07 10.2,13.07 Q1.3
N$33
  TOP 0.152: C1.2 3.92,45.89 3.92,45.82 3.63,44.25 arc-19 3.6,44.18 3.16,43.38 arc6 3.15,43.35 2.53,41.88 arc-4 2.51,41.83 1.3,39.45 arc43 1.25,38.95 1.77,37.15 arc-16 1.79,36.99 1.79,35.99 arc-2 1.79,35.97 1.06,17.58 arc2 1.06,17.53 1.06,7.37 arc9 1.08,7.13 1.49,4.65 arc36 1.78,4.07 4.33,1.53 arc43 5.05,1.22 10.05,1.07 arc2 10.09,1.07 22.87,1.22 arc1 22.89,1.22 30.83,1.47 arc24 30.93,1.5 32.22,2.12 arc18 32.23,2.14 32.24,2.14 32.29,2.19 U1.RESET
N$34  (via drill 0.4 pad 0.7)
  TOP 0.152: v27.7,11.66 27.83,11.13 arc-15 27.84,11.11 27.84,11.03 R4.4 27.84,10.54 27.76,10.54 arc20 27.73,10.53 27.54,10.46 arc15 27.39,10.38 25.96,9.37 arc-20 25.65,9.23 22.58,8.4 arc25 22.17,8.18 17.98,4.61 arc-40 17.8,4.54 16.78,4.54 arc-90 16.5,4.82 16.5,5.46 arc-41 16.57,5.64 18.01,7.31 arc41 18.08,7.5 18.08,8.13 arc90 17.8,8.41 10.27,8.41 10.2,8.41 Q7.3
  BOTTOM 0.152: v27.7,11.66 27.47,14.41 arc-8 27.47,14.49 27.96,23.17 arc3 27.96,23.18 28.03,43.18 arc-5 28.03,43.3 28.68,49.95 28.68,49.96 28.68,50.04 U1.D13
N$37  (via drill 0.4 pad 0.7)
  TOP 0.152: v28.1,14.46 27.69,12.49 | 27.69,12.49 25.72,11.79 arc-3 25.67,11.77 23.25,11.08 arc-5 23.13,11.05 22.66,10.95 arc25 22.23,10.77 19.84,9.02 arc-36 19.8,9 19.72,9 Q5.3 | 27.69,12.49 28.1,12.15 arc-26 28.27,11.93 28.63,11.14 arc-25 28.64,11.11 28.64,11.03 R4.3
  BOTTOM 0.152: U1.D12 31.23,50.04 31.23,49.96 31.23,49.95 30.57,43.3 arc4 30.57,43.21 30.39,35.53 arc-5 30.39,35.43 v28.1,14.46
P1
  TOP 0.152: C3.2 60.01,48.15 59.94,48.15 arc-60 59.87,48.19 58.83,50 arc14 58.82,50.01 58.82,50.02 58.77,50.07 U1.D2 59.06,50.37 59.12,50.31 61.26,48.17 arc45 61.31,48.15 61.39,48.15 C5.2
P2
  TOP 0.152: U1.D3 55.61,50.04 55.61,49.96 55.56,48.23 55.56,48.15 C4.2
PUMP_VCC
  TOP 0.152: U1.D4 53.07,50.04 53.07,49.96 53.03,45.29 53.03,43.1 arc10 53.04,43.06 53.39,40.98 arc-10 53.39,40.97 53.39,40.89 D1.AQ 54.3,38.86 54.38,38.86 arc-38 54.43,38.85 65.83,30.03 arc-52 65.94,29.81 65.94,20.74 arc-70 65.75,20.47 60.63,18.6 arc14 60.49,18.53 59.81,18.06 arc56 59.77,18 59.77,17.92 R11.2
SCI  (via drill 0.4 pad 0.7)
  TOP 0.152: R26.1 10.08,2.69 10.08,2.61 v10.08,2.06 | v50.31,13.86 49.76,13.86 49.68,13.86 IC1.5 | Q3.2 39.32,21.66 39.24,21.66 arc-37 39.19,21.67 38.12,22.49 arc-14 38.07,22.54 37.27,23.55 37.27,23.56 35.63,25.68 arc-17 35.38,26.14 U$2.P$7
  TOP-1 0.152: v10.08,2.06 6.09,10.39 arc1 6.08,10.4 A3.3.PB3 | A2.3.PB3 v50.31,13.86
  BOTTOM+1 0.152: U$2.P$7 29.76,36.61 arc28 29.21,36.74 24.13,36.74 arc1 24.11,36.74 21.57,36.69 arc25 21.09,36.57 U$2.P$2 A3.3.PB3 4.08,10.4 arc116 5.08,8.79 22.86,8.84 arc8 23.01,8.85 25.53,9.2 25.54,9.2 36.82,10.83 arc-18 37.4,10.82 48.71,8.85 arc-16 49.01,8.75 A2.3.PB3
SDI_MOSI
  TOP 0.152: A2.6.PB0 49.88,10.97 arc20 49.96,11.03 51.54,12.68 arc3 51.61,12.76 53.39,14.84 arc-27 53.63,15.02 53.84,15.11 arc-22 53.87,15.11 53.95,15.11 IC1.11 | Q4.2 16.86,3.48 16.78,3.48 | 16.78,3.48 | 16.78,3.48 10.6,3.49 | 10.6,3.49 | 10.6,3.49 10.53,3.49 R26.2 10.03,3.49 9.95,3.49 arc47 9.9,3.47 9.75,3.31 arc39 9.67,3.13 9.63,2.59 arc-86 9.35,2.33 8.7,2.33 arc-35 8.54,2.38 A3.6.PB0
  BOTTOM+1 0.152: U$2.P$12 42.41,36.57 arc7 42.28,36.63 26.3,42.11 arc-7 26.17,42.17 U$2.P$21
  BOTTOM 0.152: U$2.P$12 44.5,28.07 arc-3 44.5,28.01 A2.6.PB0 41.34,6.78 arc-22 40.94,6.68 22.81,5.89 arc1 22.8,5.89 A3.6.PB0 | U$2.P$21 25.3,35.74 arc-13 25.31,35.47 24.62,26.8 24.62,26.79 24.62,26.71 X1.4
SDO-SCK  (via drill 0.4 pad 0.7)
  TOP 0.152: v47.17,15.07 47.47,15.8 arc-14 47.5,15.86 47.79,16.26 arc36 47.8,16.31 47.8,16.38 IC1.3 | R26.4 10.03,5.44 10.03,5.51 arc20 10.02,5.54 9.95,5.73 arc31 9.76,6.01 8.32,7.17 arc39 8.27,7.19 8.2,7.19 Q7.2 7.33,7.67 7.25,7.67 arc-46 7.2,7.7 A3.4.PB2
  TOP-1 0.152: X1.3 25.03,23.18 25.08,23.13 arc12 25.1,23.12 A2.4.PB2 v47.17,15.07
  BOTTOM+1 0.152: U$2.P$14 39.87,44.19 arc25 39.4,44.31 26.71,44.67 arc0 26.7,44.67 24.16,44.72 arc9 23.91,44.7 21.42,44.35 arc20 21.04,44.23 U$2.P$23 | X1.3 23.74,23.18 23.68,23.13 arc-10 23.67,23.12 A3.4.PB2
  BOTTOM 0.152: U$2.P$23 20.48,35.36 arc6 20.51,35.24 23.36,25.64 arc8 23.37,25.61 24,24.22 arc21 24.02,24.2 24.07,24.14 X1.3
SII-MISO
  TOP 0.152: Q5.2 16.86,7.57 16.78,7.57 arc25 16.75,7.56 10.63,4.64 arc-26 10.6,4.64 10.53,4.64 R26.3 10.03,4.64 9.95,4.64 arc-47 9.9,4.66 9.75,4.82 arc-39 9.67,4.99 9.63,5.53 arc66 9.45,5.78 A3.5.PB1 | IC1.1 49.68,19.43 49.68,19.51 arc-33 49.7,19.55 53.41,25.2 arc-31 54.2,25.89 56.62,27.06 arc216 55.15,28.59 54.58,27.54 arc-124 52.6,27.55 U$2.P$13
  BOTTOM+1 0.152: U$2.P$22 23.58,44.23 arc-29 24.15,44.36 26.69,44.31 arc-64 27.7,43.65 28.14,42.69 arc65 29.21,42 41.91,42 arc28 42.46,42.13 U$2.P$13 | A2.5.PB1 43.93,6.74 arc-27 43.41,6.63 40.87,6.68 arc-6 40.77,6.69 25.53,8.48 arc8 25.38,8.49 22.84,8.43 arc2 22.8,8.43 A3.5.PB1
  BOTTOM 0.152: U$2.P$13 47.08,28.26 arc-13 47.09,28 A2.5.PB1
VCC
  TOP 0.152: U1.5V 37.37,2.89 37.32,2.94 36.04,3.63 arc5 36.02,3.64 29.33,6.46 | R4.5 28.18,9.54 28.26,9.54 28.56,9.54 28.64,9.54 R4.6 | SW4.O 3.48,42.62 3.48,42.54 arc-11 3.48,42.52 2.38,37.03 arc9 2.38,37 1.42,17.58 arc3 1.42,17.53 1.42,7.37 arc59 1.97,6.4 3.08,5.75 arc-29 3.46,5.37 4.12,4.26 arc35 4.61,3.81 8.43,2.03 arc3 8.47,2.02 9.84,1.47 arc30 10.17,1.44 22.7,3.34 25.56,3.77 arc29 26.04,3.98 29.33,6.46 | R4.6 28.98,9.54 29.06,9.54 29.36,9.54 29.44,9.54 R4.7 29.78,9.54 29.86,9.54 30.16,9.54 30.24,9.54 R4.8 | R4.6 28.98,9.29 28.98,9.21 28.98,9.2 29.33,6.46
VCC_OFF
  TOP 0.152: Q2.1 14.91,18.07 14.91,18.14 arc-25 14.91,18.18 23.05,36.05 arc-39 23.61,36.62 34.81,42.12 arc42 35.39,42.75 35.73,43.61 arc-20 35.94,43.96 41.25,50.01 41.26,50.02 41.31,50.07 U1.D8

## Text on the board
bNames: ATTiny Fuse Reset with 12V / Charge Pump Programmer | TAMI.org.il | V001 05/08/2015 / TAMI.org.il
Name: |&lt; digital 13-8&gt;| | |&lt; digital 7-2 &gt;| | gnd | TX | RX | HV | ISP | |&lt;8 pin&gt;| | |&lt;--14 pin--&gt;| | 5V | 3.3V | TAMI ATtiny / HV / ISP / Programmer | test | load | |&lt;8 pin&gt;| | |&lt;--14 pin--&gt;| | PB0 | PB1 | PB2 | PB3 | ISP | PB4 | PB5 | ATTami | HV | H.B. | prog | ERR | ATTami | rst | 3v3 | 5V | -GND- | VIN | |&lt; analog 0-5 &gt;|